# EAGLE board Copy of Robot arm 5 with servos (EAGLE 7.6.0)

Size 56.82 x 53.33 mm. Coordinates in mm from the lower left corner, seen from the top.
Outline: 0,0 56.82,0 56.82,53.33 0,53.33 0,0
Copper layers (1*16): Top 0.035mm / dielectric 1.5mm / Bottom 0.035mm
Design rules "default": minimum track width 10mil, minimum drill 24mil, track to track 8mil, track to pad 8mil, pad to pad 8mil, via to via 8mil, smd to smd 8mil, copper to edge 40mil, drill to drill 8mil, minimum pad ring 10mil, minimum via ring 8mil, stop-mask expansion 4mil, vias tented up to drill 0mil, thermal gap 10mil

## Footprints (pad centres in the part's own frame; a part is rotated, then mirrored left to right if it is on the bottom)
PT-10 = drill 1.016 octagon: A -2.54,-5.08; E 2.54,-5.08; S 0,5.08
0207/10 = drill 0.813 octagon: 1 -5.08,0; 2 5.08,0
TL1105 = drill 1 pad 1.676: 1 -2.25,3.25; 2 2.25,3.25; 3 -2.25,-3.25; 4 2.25,-3.25
M251 = drill 0.813 long: 1 -2.54,0; 2 0,0; 3 2.54,0
1X3P-2.54-2.54-11.6-3.0-BLACK-MALE = drill 0.889 pad 1.651 square: 1 0,2.54 | drill 0.889 pad 1.651: 2 0,0; 3 0,-2.54

## Placement (x,y rotation side)
R1  [PT-10]  5,73.58 0 top  (outside the outline)
R2  [PT-10]  5,86.28 0 top  (outside the outline)
R3  [PT-10]  5,98.98 0 top  (outside the outline)
R4  [PT-10]  5,111.68 0 top  (outside the outline)
R5  [PT-10]  5,124.38 0 top  (outside the outline)
R6  1k‎Ω  [0207/10]  5,162.48 0 top  (outside the outline)
S1  [TL1105]  5,137.08 0 top  (outside the outline)
S2  [M251]  5,149.78 0 top  (outside the outline)
SERVOarm  [1X3P-2.54-2.54-11.6-3.0-BLACK-MALE]  5,22.78 0 top
SERVOarm2  [1X3P-2.54-2.54-11.6-3.0-BLACK-MALE]  5,10.08 0 top
SERVOarm3  [1X3P-2.54-2.54-11.6-3.0-BLACK-MALE]  5,60.88 0 top  (outside the outline)
SERVObase  [1X3P-2.54-2.54-11.6-3.0-BLACK-MALE]  5,35.48 0 top
SERVOgripper  [1X3P-2.54-2.54-11.6-3.0-BLACK-MALE]  5,48.18 0 top

## Library data of the parts
R1-R6 S1 S2 SERVOarm SERVOarm2 SERVOarm3 SERVObase SERVOgripper = AUTODESK_CIRCUITS_BREADBOARD

## Nets
N$1: R4.S
N$2: R5.S
N$3: R2.S
N$4: R3.S
N$5: R1.S
N$6: SERVOgripper.2
N$7: SERVOarm3.2
N$8: SERVOarm2.2
N$9: R1.A R2.A R3.A R4.A R5.A S1.4 S2.1 SERVOarm2.3 SERVOarm3.3 SERVOarm.3 SERVObase.3 SERVOgripper.3
N$10: S1.2
N$11: S1.1
N$12: R6.2 S1.3
N$13: S2.2
N$14: R1.E R2.E R3.E R4.E R5.E R6.1 S2.3 SERVOarm2.1 SERVOarm3.1 SERVOarm.1 SERVObase.1 SERVOgripper.1
N$15: SERVObase.2
N$16: SERVOarm.2

## Tracks (layer width: path | path; a pad name or v marks a point on that pad's centre or on a via)
N$9  (11 unrouted)
N$12  (1 unrouted)
N$14  (11 unrouted)